# EAGLE board kolektorius_v2.2_ch340g (EAGLE 6.5.0)
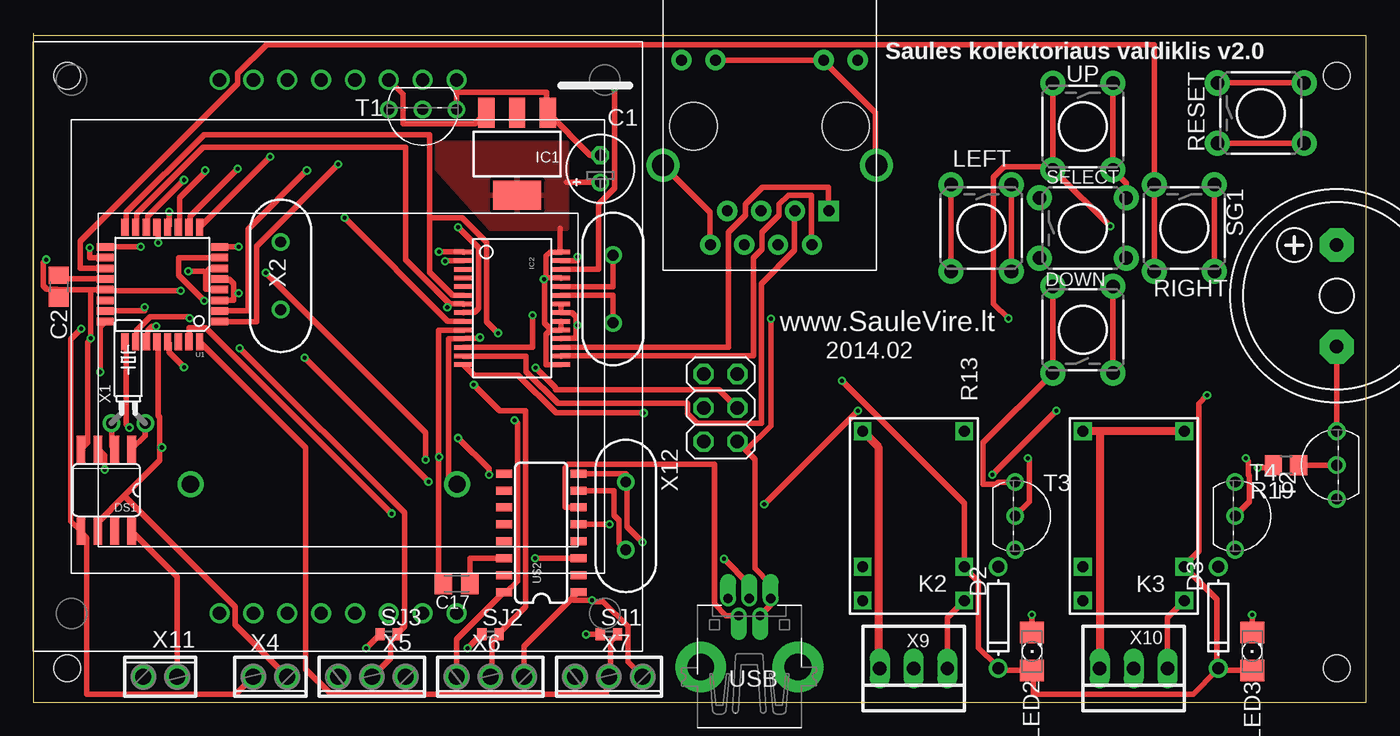
[diagram p0: board, top side]
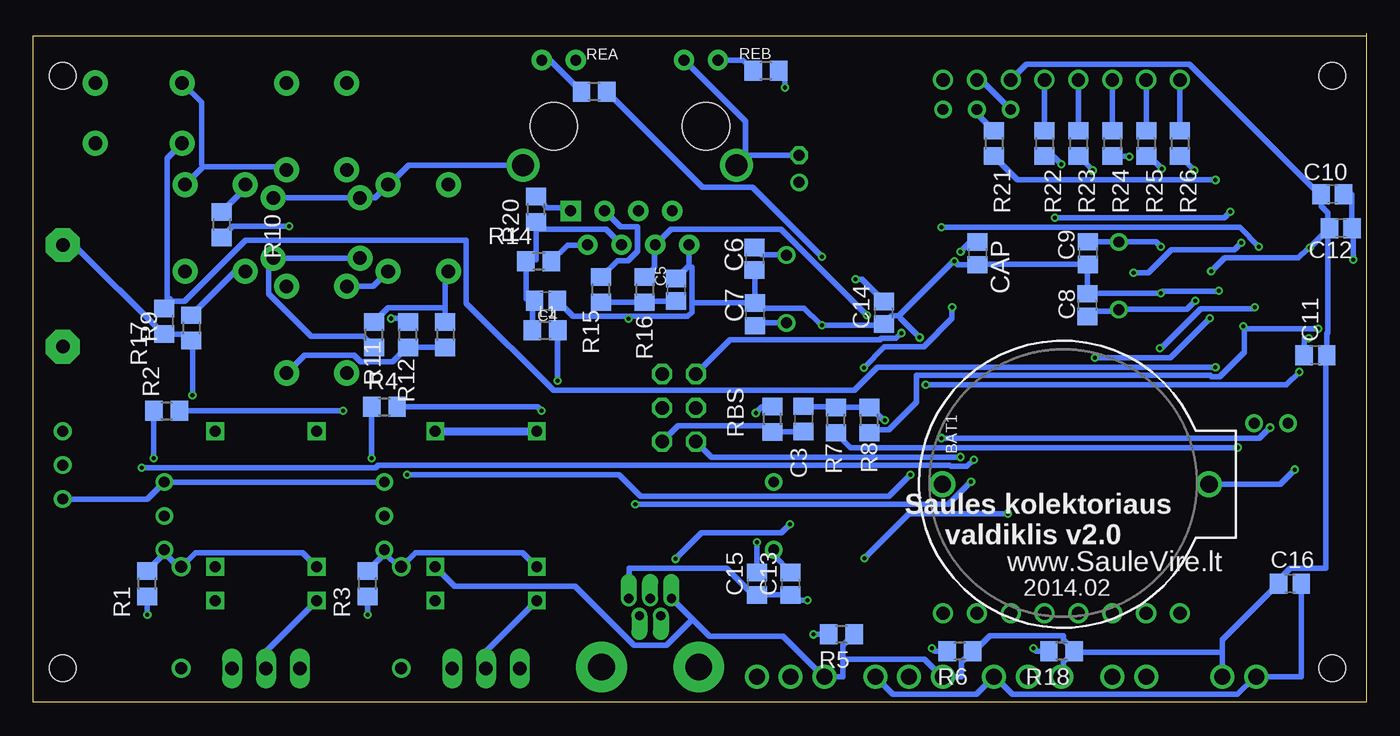
[diagram p1: board, bottom side, seen from below]

Size 100 x 50.16 mm. Coordinates in mm from the lower left corner, seen from the top.
Outline: 0,50 100,50 100,0 0,0 0,50.16
Copper layers (1*16): Top 0.035mm / dielectric 1.5mm / Bottom 0.035mm
Design rules "ITEADstudio_DRC": minimum track width 6mil, minimum drill 12mil, track to track 6mil, track to pad 6mil, pad to pad 6mil, via to via 6mil, smd to smd 0mil, copper to edge 10mil, drill to drill 10mil, minimum pad ring 10mil, minimum via ring 6mil, stop-mask expansion 2mil, vias tented up to drill 100mil, thermal gap 10mil
Net classes: 0 default: width 0.406 mm, clearance 0.203 mm; 1 power: width 0.61 mm, clearance 0.203 mm; 2 GND: width 0.61 mm; 3 signal: width 0.457 mm
Holes 2 mm at 2.54,2.54 97.79,2.54 2.54,46.99 97.79,46.99
vRestrict: area 32,73 to 71,78

## Footprints (pad centres in the part's own frame; a part is rotated, then mirrored left to right if it is on the bottom)
BATTCOM_20MM_PTH = drill 1.3: 1 20,0; 2 0,0
E2-5 = drill 0.813 pad 1.27: + -1.016,0 | drill 0.813 pad 1.27 octagon: - 1.016,0
C0805 = smd 1.3 x 1.5: 1 -0.85,0; 2 0.85,0
C0805' = smd 1.3 x 1.5: 1 -0.95,0; 2 0.95,0
C0805K = smd 1.3 x 1.6: 1 -1,0; 2 1,0
DO-1N4148 = drill 0.9: A -3.81,0; C 3.81,0
TACTILE-PTH = drill 1.016 pad 1.88: 1 -3.251,2.261; 2 3.251,2.261; 3 -3.251,-2.261; 4 3.251,-2.261
SO08 = smd 0.66 x 2.032: 1 -1.905,-3.073; 2 -0.635,-3.073; 3 0.635,-3.073; 4 1.905,-3.073; 5 1.905,3.073; 6 0.635,3.073; 7 -0.635,3.073; 8 -1.905,3.073
SOT223 = smd 1.219 x 2.235: 1 -2.311,-3.099; 2 0,-3.099; 3 2.311,-3.099 | smd 3.6 x 2.2: 4 0,3.099
SSOP28DB = smd 0.348 x 1.397: 1 -4.225,-3.656; 2 -3.575,-3.656; 3 -2.925,-3.656; 4 -2.275,-3.656; 5 -1.625,-3.656; 6 -0.975,-3.656; 7 -0.325,-3.656; 8 0.325,-3.656; 9 0.975,-3.656; 10 1.625,-3.656; 11 2.275,-3.656; 12 2.925,-3.656; 13 3.575,-3.656; 14 4.225,-3.656; 15 4.225,3.656; 16 3.575,3.656; 17 2.925,3.656; 18 2.275,3.656; 19 1.625,3.656; 20 0.975,3.656; 21 0.325,3.656; 22 -0.325,3.656; 23 -0.975,3.656; 24 -1.625,3.656; 25 -2.275,3.656; 26 -2.925,3.656; 27 -3.575,3.656; 28 -4.225,3.656
2X03 = drill 1.016 octagon: 1 -2.54,-1.27; 2 -2.54,1.27; 3 0,-1.27; 4 0,1.27; 5 2.54,-1.27; 6 2.54,1.27
G5V1 = drill 0.813 square: 1 0,0; 2 2.54,0; 5 12.7,0; 6 12.7,7.62; 9 2.54,7.62; 10 0,7.62
R0805 = smd 1.3 x 1.5: 1 -0.95,0; 2 0.95,0
1206 = smd 1.6 x 1.803: A -1.422,0; C 1.422,0
HR911105A = drill 0.813 pad 1.524: G+ 4.953,-6.604; G- 4.953,-4.064; GND -8.89,4.445; NC -6.35,3.175; P4 -8.89,-0.635; P5 -6.35,0.635; RD+ -6.35,-1.905; RD- -8.89,1.905; TD- -8.89,-3.175; Y+ 4.953,6.604; Y- 4.953,4.064 | drill 1.651 pad 2.159: SHIELD0 -2.921,8.001; SHIELD1 -2.921,-8.001 | drill 0.813 pad 1.524 square: TD+ -6.35,-4.445 | hole 3.556: 0,-5.715; 0,5.715
F/HMB = drill 1.016 pad 2.54 octagon: + 3.81,0; - -3.81,0
R0402 = smd 0.7 x 0.9: 1 -0.65,0; 2 0.65,0
TO92-EBC-OVAL = drill 0.813: B 0,-1.27; C 2.54,-1.27; E -2.54,-1.27
TQFP32-08 = smd 1.27 x 0.559: 1 -4.293,2.8; 2 -4.293,2; 3 -4.293,1.2; 4 -4.293,0.4; 5 -4.293,-0.4; 6 -4.293,-1.2; 7 -4.293,-2; 8 -4.293,-2.8; 17 4.293,-2.8; 18 4.293,-2; 19 4.293,-1.2; 20 4.293,-0.4; 21 4.293,0.4; 22 4.293,1.2; 23 4.293,2; 24 4.293,2.8 | smd 0.559 x 1.27: 9 -2.8,-4.293; 10 -2,-4.293; 11 -1.2,-4.293; 12 -0.4,-4.293; 13 0.4,-4.293; 14 1.2,-4.293; 15 2,-4.293; 16 2.8,-4.293; 25 2.8,4.293; 26 2,4.293; 27 1.2,4.293; 28 0.4,4.293; 29 -0.4,4.293; 30 -1.2,4.293; 31 -2,4.293; 32 -2.8,4.293
CELLPHONE_NOKIA_5100_SPARKFUN = drill 1: P$1 -8.89,20; P$2 -6.35,20; P$3 -3.81,20; P$4 -1.27,20; P$5 1.27,20; P$6 3.81,20; P$7 6.35,20; P$8 8.89,20; P$9 -8.89,-20; P$10 -6.35,-20; P$11 -3.81,-20; P$12 -1.27,-20; P$13 1.27,-20; P$14 3.81,-20; P$15 6.35,-20; P$16 8.89,-20
SO016 = smd 0.6 x 1.2: 1 -4.445,-2.8; 2 -3.175,-2.8; 3 -1.905,-2.8; 4 -0.635,-2.8; 5 0.635,-2.8; 6 1.905,-2.8; 7 3.175,-2.8; 8 4.445,-2.8; 9 4.445,2.8; 10 3.175,2.8; 11 1.905,2.8; 12 0.635,2.8; 13 -0.635,2.8; 14 -1.905,2.8; 15 -3.175,2.8; 16 -4.445,2.8
USB-MINIB-THM-MOLEX = drill 0.7 offset: D+ 0,9.72; D- -0.8,8.42; GND 1.6,9.72; ID 0.8,8.42; VBUS -1.6,9.72 | drill 2 pad 3.81: GND1 -3.65,4.57; GND4 3.65,4.57
TC26H = drill 0.813: 1 -1.27,0; 2 1.27,0
HC49US = drill 0.813: 1 -2.54,0; 2 2.54,0
2POL254 = drill 1.2: 1 -1.27,0; 2 1.27,0
3POL254 = drill 1.2: 1 -2.54,0; 2 0,0; 3 2.54,0
22-23-2031 = drill 1 long: 1 -2.54,0; 2 0,0; 3 2.54,0

## Placement (x,y rotation side)
BAT1  [BATTCOM_20MM_PTH]  31.8,16.35 0 bottom
C1  100u  [E2-5]  42.55,40.01 90 top
C2  100n  [C0805]  1.91,31.17 270 top
C3  0.1u  [C0805']  42.21,21.24 270 bottom
C4  0.1µ  [C0805]  61.55,30.1 180 bottom
C5  0.1µ  [C0805]  51.76,30.93 270 bottom
C6  18p  [C0805]  45.88,33.26 270 bottom
C7  18p  [C0805]  45.86,29.09 90 bottom
C8  22p  [C0805]  20.92,29.79 270 bottom
C9  22p  [C0805]  20.87,33.69 90 bottom
C10  100n  [C0805]  2.54,38.1 0 bottom
C11  100n  [C0805]  3.81,26.04 0 bottom
C12  100n  [C0805]  1.91,35.56 180 bottom
C13  22p  [C0805]  43.18,8.89 90 bottom
C14  100n  [C0805]  36.2,29.21 270 bottom
C15  22p  [C0805]  45.72,8.89 90 bottom
C16  100n  [C0805]  5.71,8.89 0 bottom
C17  [C0805K]  31.75,8.89 180 top
CAP  10u  [C0805]  29.16,33.66 270 bottom
D2  [DO-1N4148]  72.39,6.35 270 top
D3  [DO-1N4148]  88.9,6.35 270 top
DOWN  [TACTILE-PTH]  78.74,27.94 90 top
DS1  DS1307  [SO08]  5.48,15.91 180 top
IC1  LM1117-33  [SOT223]  36.3,41.12 180 top
IC2  ENC28J60  [SSOP28DB]  35.93,29.54 270 top
ISP  [2X03]  51.56,22.08 270 top
K2  G5V1  [G5V1]  69.85,7.62 90 top
K3  JRC-21F(4100)  [G5V1]  86.36,7.62 90 top
L1  Bead  [R0805]  61.61,27.91 0 bottom
LED2  [1206]  74.93,3.81 90 top
LED3  [1206]  91.44,3.81 90 top
LEFT  [TACTILE-PTH]  71.12,35.56 270 top
R1  470  [R0805]  91.44,8.89 90 bottom
R2  3k3  [R0805]  89.99,21.87 0 bottom
R3  470  [R0805]  74.93,8.89 90 bottom
R4  3k3  [R0805]  73.66,22.17 0 bottom
R5  4k7  [R0805]  39.37,5.08 180 bottom
R6  4k7  [R0805]  30.48,3.81 180 bottom
R7  10k  [R0805]  39.78,21.16 90 bottom
R8  10k  [R0805]  37.27,21.16 90 bottom
R9  2k  [R0805]  88.14,28.07 270 bottom
R10  330  [R0805]  85.85,35.81 90 bottom
R11  3k3  [R0805]  74.42,27.56 90 bottom
R12  620  [R0805]  71.88,27.56 90 bottom
R13  1k  [R0805]  69.09,27.56 270 bottom
R14  49  [R0805]  62.09,33.05 180 bottom
R15  49  [R0805]  57.42,30.95 90 bottom
R16  49  [R0805]  54.14,30.94 270 bottom
R17  10k  [R0805]  90.17,28.57 270 bottom
R18  4k7  [R0805]  22.86,3.81 180 bottom
R19  1k  [R0805]  93.98,17.78 180 top
R20  49  [R0805]  62.27,36.97 90 bottom
R21  1k  [R0805]  27.94,41.91 270 bottom
R22  10k  [R0805]  24.13,41.91 270 bottom
R23  10k  [R0805]  21.59,41.91 270 bottom
R24  10k  [R0805]  19.05,41.91 270 bottom
R25  10k  [R0805]  16.51,41.91 270 bottom
R26  10k  [R0805]  13.97,41.91 270 bottom
RBS  2.32K  [R0805]  44.53,21.23 90 bottom
REA  330  [R0805]  57.92,45.8 180 bottom
REB  330  [R0805]  45.03,47.36 180 bottom
RESET  [TACTILE-PTH]  92.09,44.18 0 top
RIGHT  [TACTILE-PTH]  86.36,35.56 270 top
RJ1  HR911105A  [HR911105A]  55.24,43.2 90 top
SELECT  [TACTILE-PTH]  78.74,35.56 0 top
SG1  F/HMB  [F/HMB]  97.79,30.48 90 top
SJ1  0R  [R0402]  43.18,5.08 0 top
SJ2  0R  [R0402]  34.29,5.08 0 top
SJ3  0R  [R0402]  26.67,5.08 0 top
T1  2N2222  [TO92-EBC-OVAL]  29.21,43.18 180 top
T2  2N2222  [TO92-EBC-OVAL]  96.52,17.78 90 top
T3  2N2222  [TO92-EBC-OVAL]  74.93,13.97 270 top
T4  2N2222  [TO92-EBC-OVAL]  91.44,13.97 270 top
U1  ATMEGA328P  [TQFP32-08]  9.68,31.34 180 top
U$1  CELLPHONE_NOKIA_5100  [CELLPHONE_NOKIA_5100_SPARKFUN]  22.86,26.67 0 top
U$2  CH340G  [SO016]  38.1,12.7 90 top
UP  [TACTILE-PTH]  78.74,43.18 270 top
USB  [USB-MINIB-THM-MOLEX]  53.72,-1.93 0 top
X1  32.768kHz  [TC26H]  7.13,20.93 0 top
X2  16MHz  [HC49US]  18.56,31.98 270 top
X3  25MHz  [HC49US]  43.49,30.99 90 top
X4  [2POL254]  17.78,1.91 180 top
X5  [3POL254]  25.4,1.91 180 top
X6  [3POL254]  34.29,1.91 180 top
X7  [3POL254]  43.18,1.91 180 top
X9  22-23-2031  [22-23-2031]  66.04,2.54 180 top
X10  22-23-2031  [22-23-2031]  82.55,2.54 180 top
X11  [2POL254]  9.53,1.91 0 top
X12  16MHz  [HC49US]  44.45,13.97 270 top

## Library data of the parts
BAT1 DOWN LEFT RESET RIGHT SELECT UP = SparkFun-Electromechanical
C1 C2 C4-C16 CAP = resistor
C3 C17 L1 R1-R26 RBS REA REB SJ1-SJ3 = rcl
D2 D3 DS1 LED2 LED3 T1-T4 USB = adafruit
IC1 X2 X3 X12 = SparkFun
IC2 = SparkFun-DigitalIC
ISP = pinhead
K2 K3 = relay; MPN: G5V-1-DC24; OC_FARNELL: 9949593; OC_NEWARK: 36M6377
RJ1 = CONNECTER
SG1 = buzzer; OC_FARNELL: unknown; OC_NEWARK: unknown
U1 = SparkFun-DigitalIC; PROD_ID: IC-09069
U$1 = DIY-Cellphone
U$2 = ch340
X1 = crystal; OC_FARNELL: unknown; OC_NEWARK: unknown
X4-X7 X11 = con-phoenix-254; OC_FARNELL: unknown; OC_NEWARK: unknown
X9 X10 = con-molex; MF: MOLEX; MPN: 22-23-2031; OC_FARNELL: 1462950; OC_NEWARK: 30C0862

## Nets
+3V3: C1.+ C14.1 IC1.4 IC2.15 IC2.19 IC2.20 IC2.25 IC2.28
+5V: C3.1 C10.1 C11.2 C12.2 C16.1 D2.C D3.C DS1.8 IC1.3 K2.2 K3.2 L1.2 LED2.A LED3.A R5.1 R6.1 R7.2 R8.2 R9.2 R17.2 R18.1 SG1.+ U1.4 U1.6 U1.18 U$1.P$6 U$2.16 USB.VBUS X5.3 X6.3 X7.3 X11.2
A0: SJ3.2 U1.23 X5.2
A1: SJ2.2 U1.24 X6.2
A2: R2.2 U1.25
A3: R4.2 U1.26
A6: R9.1 R10.2 RIGHT.3 RIGHT.4 U1.19
A7: U1.22
D2: SJ1.2 U1.32 X7.2
D3: R22.2 U1.1
D4: R23.2 U1.2
D5: R24.2 U1.9
D6: R25.2 U1.10
D7: R26.2 U1.11
D8: IC2.9 U1.12
D9: R19.2 U1.13
D10: R21.2 U1.14
D11: IC2.7 ISP.4 U1.15
D12: IC2.6 ISP.1 U1.16
D13: IC2.8 U1.17
GND: BAT1.2 C1.- C2.2 C3.2 C4.1 C5.1 C6.2 C7.2 C8.1 C9.1 C10.2 C11.1 C12.1 C13.1 C14.2 C15.1 C16.2 CAP.2 DOWN.1 DOWN.2 DS1.4 IC1.1 IC2.2 IC2.11 IC2.18 IC2.21 IC2.22 ISP.6 LEFT.1 LEFT.2 RBS.1 RESET.1 RESET.2 RIGHT.1 RIGHT.2 RJ1.G- RJ1.GND RJ1.SHIELD0 RJ1.SHIELD1 RJ1.Y- SELECT.1 SELECT.2 T1.E T2.E T3.E T4.E U1.3 U1.5 U1.21 U$1.P$8 U$2.1 UP.1 UP.2 USB.GND USB.ID X5.1 X6.1 X7.1 X11.1
LEDA: REA.2 RJ1.G+
LEDB: REB.2 RJ1.Y+
N$1: LEFT.3 LEFT.4 R11.2 R13.1
N$2: D2.A K2.9 R3.2 T3.C
N$3: R4.1 T3.B
N$4 [power]: K2.5 K2.6 X9.3
N$5: K2.10 X9.2
N$6: DOWN.3 DOWN.4 R12.1 R13.2
N$7: LED2.C R3.1
N$8: DS1.1 X1.2
N$9: R10.1 R12.2 UP.3 UP.4
N$10: C13.2 U$2.7 X12.2
N$11: U$2.6 USB.D-
N$12: D3.A K3.9 R1.2 T4.C
N$13: R2.1 T4.B
N$14: K2.1 X9.1
N$15: U$2.5 USB.D+
N$16: K3.10 X10.2
N$17: R6.2 SJ2.1
N$18: R11.1 SELECT.3 SELECT.4
N$19 [power]: K3.5 K3.6 X10.3
N$20: K3.1 X10.1
N$21: LED3.C R1.1
N$22: R22.1 U$1.P$5
N$23: R25.1 U$1.P$2
N$24: R24.1 U$1.P$3
N$25: R23.1 U$1.P$4
N$26 [signal]: T1.C U$1.P$7
N$27: R19.1 T2.B
N$28: R18.2 SJ3.1
N$29: SG1.- T2.C
N$30: DS1.2 X1.1
N$31: R5.2 SJ1.1
N$32: C9.2 U1.8 X2.1
N$33: C8.2 U1.7 X2.2
N$34: IC2.27 REA.1
N$35: C2.1 U1.20
N$36: BAT1.1 DS1.3
N$37: IC2.26 REB.1
N$39: CAP.1 IC2.1
N$40: C15.2 U$2.8 X12.1
N$41: C6.1 IC2.24 X3.2
N$42: C7.1 IC2.23 X3.1
N$43: C17.1 U$2.14
N$44: R21.1 T1.B
N$46: R17.1 RESET.3 RESET.4 U1.29
N$54: C5.2 R15.1 R16.2
N$59: IC2.14 RBS.2
RD+: IC2.13 R15.2 RJ1.RD+
RD-: IC2.12 R16.1 RJ1.RD-
RESET: C17.2 IC2.10 ISP.5
RXD: U1.30
SCK: ISP.3
SCL: DS1.6 R7.1 U1.28 X4.1
SDA: DS1.5 R8.1 U1.27 X4.2
TCT: C4.2 L1.1 R14.2 R20.1 RJ1.P4
TD+: IC2.17 R20.2 RJ1.TD+
TD-: IC2.16 R14.1 RJ1.TD-
TXD: U1.31 U$2.3
V$: R26.1 U$1.P$1
VIN: ISP.2

## Tracks (layer width: path | path; a pad name or v marks a point on that pad's centre or on a via)
+3V3  (via drill 0.3)
  Top 0.406: 40.01,38.99 C1.+ | 38.79,27.91 38.48,27.61 38.48,25.32 39.57,25.32 IC2.15 | 38.79,27.91 39.57,27.91 IC2.19 39.6,28.12 IC2.20 | 38.48,31.83 39.57,31.83 IC2.25 | 38.48,31.83 38.48,33.48 38.76,33.76 39.57,33.76 IC2.28 39.52,33.96 39.52,35.56 | 38.48,31.83 v38.3,31.73 38.35,31.52 38.35,28.42 38.68,28.09 38.79,27.91
  Bottom 0.406: v38.3,31.73 37.85,31.73 36.2,30.07 C14.1
  pour Top: 28.57,41.91 40.01,41.91 40.01,35.56 34.29,35.56
+5V  (via drill 0.3)
  Top 0.406: D3.C 88.9,2.41 91.44,2.41 LED3.A | D3.C 88.8,2.72 88.8,7.72 K3.2 86.46,10.34 87.43,11.3 87.43,22.38 v88.06,23.01 | v60.68,24.11 69.85,14.94 K2.2 69.95,9.98 70.92,9.02 70.92,4.09 72.29,2.72 D2.C 72.39,2.41 74.93,2.41 LED2.A 75.03,2.21 75.03,0.61 87.02,0.61 88.72,2.31 D3.C | IC1.3 33.96,44.2 33.15,43.38 27.74,43.38 27.74,45.59 U$1.P$6 | 12.93,32.21 12.93,30.96 13.97,30.96 U1.4 | 12.93,32.21 13.26,32.54 U1.6 | v4.24,34.09 4.24,33.35 U1.18 | v11.63,32.31 12.75,32.31 12.93,32.21 | X11.2 10.79,9.42 DS1.8 | X6.3 31.75,4.72 35.28,8.26 U$2.16 35.48,8.23 36.32,9.07 36.32,20.93 v36.09,21.16
  Bottom 0.406: SG1.+ 96.93,34.29 90.35,27.71 R17.2 88.62,27.61 R9.2 88.06,26.92 v88.06,23.01 | v60.68,24.11 60.68,27.89 L1.2 | C12.2 2.77,35.56 v4.24,34.09 4.42,33.98 5.08,33.33 10.62,33.33 v11.63,32.31 | C12.2 2.87,35.18 2.87,27.71 2.95,27.64 2.95,26.04 C11.2 3.05,25.86 3.05,10.06 5.69,10.06 6.68,9.07 C16.1 6.58,8.89 10.79,4.67 10.79,3.73 | C12.2 2.87,35.74 2.87,36.7 3.38,37.21 3.38,38.1 C10.1 3.58,38.18 13.26,47.85 25.5,47.85 26.67,46.69 U$1.P$6 | 39.24,3.23 39.24,1.91 X7.3 40.82,2.01 43.76,4.95 49.28,4.95 50.53,6.21 | 39.24,3.23 39.24,4.27 R5.1 | 50.53,6.21 52.09,7.77 USB.VBUS | X11.2 10.79,3.73 | X5.3 22.73,1.91 22.73,3 R18.1 | C3.1 42.19,22.17 42.16,22.15 39.98,22.15 R7.2 39.78,22.12 37.29,22.12 R8.2 37.08,22.02 36.22,21.16 v36.09,21.16 | R18.1 22.02,3.99 22.73,4.7 22.73,4.98 28.25,4.98 29.34,3.89 R6.1 30.35,3 30.35,1.91 X6.3 31.93,2.01 33.15,3.23 39.24,3.23 | 10.79,3.73 21.72,3.73 R18.1 | K2.2 68.38,8.69 59.36,8.69 54.94,4.27 52.48,4.27 50.53,6.21
A0  (via drill 0.3)
  Top 0.406: X5.2 26.8,3.3 26.8,4.57 27.3,5.08 SJ3.2 27.41,5.26 27.84,5.69 27.84,14.2 v15.49,26.54 | v8.36,29.62 8.36,29.36 5.41,29.36 U1.23
  Bottom 0.406: v8.36,29.62 8.46,29.52 12.39,29.52 15.37,26.54 v15.49,26.54
A1  (via drill 0.3)
  Top 0.406: X6.2 34.42,2.03 34.42,4.57 34.92,5.08 SJ2.2 35.03,5.26 36.93,7.16 36.93,21.87 34.98,21.87 v33.05,23.8 | v5.03,24.77 5.03,28.17 5.38,28.52 U1.24
  Bottom 0.406: v5.03,24.77 5.99,23.8 v33.05,23.8
A2  (via drill 0.3)
  Top 0.406: v7.21,20.6 6.99,20.83 6.99,26.92 6.88,27.03 U1.25 | v31.88,19.81 34.19,17.5 v34.19,17.07 | v76.76,21.87 v71.96,17.07
  Bottom 0.406: v7.21,20.6 8,19.81 v31.88,19.81 | v34.19,17.07 35.81,15.44 54.43,15.44 56.06,17.07 v71.96,17.07 | R2.2 v76.76,21.87
A3  (via drill 0.3)
  Top 0.406: v11.73,28.8 11.73,28.91 8.76,28.91 7.77,27.91 7.77,27.13 7.7,27.05 U1.26 | v29.64,16.54 v20.34,25.83 | v61.87,21.87 v54.84,14.83
  Bottom 0.406: v11.73,28.8 14.71,25.83 v20.34,25.83 | v29.64,16.54 31.34,14.83 v54.84,14.83 | v61.87,21.87 62.18,22.17 R4.2
A6
  Top 0.406: U1.19 5.38,32.56 3.53,32.56 3.53,34.57 15.34,46.38 15.34,47.17 17.5,49.33 84.1,49.33 RIGHT.3 RIGHT.4
  Bottom 0.406: RIGHT.4 84.86,32.31 88.14,29.03 R9.1 | RIGHT.3 84.1,38.53 85.85,36.78 R10.2
D2
  Top 0.406: SJ1.2 43.81,5.08 43.31,4.57 43.31,2.03 X7.2 43,1.8 43,0.58 22.33,0.58 20.42,2.49 20.42,19.1 12.5,27.03 U1.32
D3  (via drill 0.3)
  Top 0.406: v22.86,40.34 16.74,34.21 16.74,28.55 13.99,28.55 U1.1
  Bottom 0.406: v22.86,40.34 23.47,40.95 24.13,40.95 R22.2
D4  (via drill 0.3)
  Top 0.406: v20.52,39.88 16.13,35.48 16.13,29.36 13.99,29.36 U1.2
  Bottom 0.406: v20.52,39.88 21.59,40.95 R23.2
D5  (via drill 0.3)
  Top 0.406: v17.78,40.92 12.5,35.64 U1.9
  Bottom 0.406: v17.78,40.92 17.8,40.95 19.05,40.95 R24.2
D6  (via drill 0.3)
  Top 0.406: v15.34,40.01 11.79,36.45 11.79,35.74 U1.10
  Bottom 0.406: v15.34,40.01 16.28,40.95 16.51,40.95 R25.2
D7  (via drill 0.3)
  Top 0.406: v12.9,39.88 12.9,39.75 10.97,37.82 10.97,35.71 10.9,35.64 U1.11
  Bottom 0.406: v12.9,39.88 13.97,40.95 R26.2
D8  (via drill 0.3)
  Top 0.406: v10.19,36.78 10.19,35.74 U1.12 | v23.34,36.32 31.09,28.57 32.26,28.57 IC2.9
  Bottom 0.406: v10.19,36.78 10.64,36.32 v23.34,36.32
D9  (via drill 0.3)
  Top 0.406: v9.37,34.47 9.37,35.53 9.3,35.61 U1.13 | v17.45,32.21 29.44,20.22 v29.44,18.19 | v91.87,17.58 93.02,17.58 93.02,17.78 R19.2
  Bottom 0.406: v9.37,34.47 9.91,33.93 14.63,33.93 16.36,32.21 v17.45,32.21 | v29.44,18.19 29.95,17.68 31.17,17.68 31.27,17.78 74.12,17.78 74.32,17.58 v91.87,17.58
D10  (via drill 0.3)
  Top 0.406: U1.14 8.59,35.74 8.59,36.45 v11.3,39.17
  Bottom 0.406: v11.3,39.17 26.16,39.17 27.94,40.95 R21.2
D11  (via drill 0.3)
  Top 0.406: 31.24,29.87 27.94,33.17 27.94,41.63 12.75,41.63 7.77,36.65 7.77,35.71 7.7,35.64 U1.15 | 31.24,29.87 32.26,29.87 IC2.7 | v37.69,25.09 39.19,23.6 39.19,23.44 51.46,23.44 52.81,22.1 ISP.4 | v31.06,29.62 31.14,29.69 31.24,29.87
  Bottom 0.406: v37.69,25.09 36.14,26.64 33.2,26.64 31.06,28.78 v31.06,29.62
D12  (via drill 0.3)
  Top 0.406: 29.72,36.32 29.72,32.26 31.45,30.53 32.26,30.53 IC2.6 | 29.72,36.32 29.72,42.55 12.8,42.55 6.99,36.73 6.99,35.74 U1.16 | v34.87,27.69 34.01,28.55 34.01,34.49 32.18,36.32 29.72,36.32
  Bottom 0.406: v34.87,27.69 35.28,27.28 36.37,27.28 36.47,27.18 47.73,27.18 50.27,24.64 ISP.1
D13  (via drill 0.3)
  Top 0.406: v8.05,34.16 5.41,34.16 U1.17 | v31.88,35.61 33.4,34.09 33.4,29.54 33.1,29.23 32.28,29.23 IC2.8
  Bottom 0.406: v8.05,34.16 9.5,35.61 v31.88,35.61
GND  (via drill 0.3)
  Top 0.406: USB.ID 54.53,6.5 55.3,7.26 55.3,7.77 USB.GND 55.27,8 55.27,8.89 54.13,10.03 54.13,18.24 53.48,18.89 | 40.42,7.79 36.83,4.19 X6.1 | 40.42,7.79 U$2.1 | 40.42,7.79 40.56,7.64 v41.91,7.64 42.09,7.54 42.75,7.54 44.6,5.69 44.6,3.02 X7.1 | 53.48,18.89 ISP.6 | RESET.1 88.85,46.46 95.33,46.46 RESET.2 | RIGHT.1 RIGHT.2 | SELECT.2 81.99,38.94 UP.2 UP.1 | T3.E 72.42,16.51 72.26,16.36 71.25,16.36 71.25,19.46 DOWN.1 DOWN.2 | LEFT.2 LEFT.1 | RJ1.Y- 59.28,48.16 RJ1.G- 59.41,47.98 63.2,44.2 63.2,40.31 63.22,40.28 RJ1.SHIELD1 | U$1.P$8 31.75,45.74 | 31.75,45.74 T1.E | C1.- 41.78,41.02 38.61,44.2 IC1.1 38.51,44.4 38.51,45.74 31.75,45.74 | 4.32,30.94 1.93,30.94 1.93,30.33 C2.2 1.75,30.96 0.99,30.96 0.74,31.22 0.74,32.97 v0.96,33.2 | 4.32,30.94 U1.21 5.59,30.86 v11.05,30.86 | 4.32,30.94 v4.32,27.3 4.22,27.13 4.09,27 4.09,19.51 3.58,19 DS1.4 | BAT1.2 31.77,16.36 31.17,16.97 31.17,27.25 32.26,27.25 IC2.11 32.49,27.3 33.5,27.3 v33.5,27.36 | 15.04,30.66 15.04,31.37 14.68,31.73 13.99,31.73 U1.5 | 15.04,30.66 15.04,30.15 13.99,30.15 U1.3 | v15.42,30.66 15.04,30.66 | 40.72,28.27 40.72,28.91 40.41,29.21 IC2.21 39.6,29.41 39.6,29.84 IC2.22 | 40.72,28.27 40.72,27.28 IC2.18 | v30.89,33.07 30.89,33.1 32.26,33.1 IC2.2 | v40.82,28.27 40.72,28.27 | RJ1.SHIELD0 47.24,40.26 50.77,36.73 50.77,34.31 RJ1.GND | 53.48,18.89 55.35,20.75 v55.35,28.75
  Bottom 0.406: C3.2 44.53,20.3 RBS.1 44.7,20.4 45.03,20.73 51.64,20.73 52.81,19.56 ISP.6 | C16.2 4.88,1.91 X11.1 8.43,1.8 9.65,0.58 26.54,0.58 27.76,1.8 X5.1 29.26,0.58 35.51,0.58 X6.1 | v41.91,7.64 42.7,7.64 43,7.95 C13.1 43.18,8.05 45.72,8.05 C15.1 45.9,8.15 46.13,8.15 48.01,10.03 55.3,10.03 55.3,7.8 USB.GND | SELECT.2 SELECT.1 74.37,37.82 LEFT.1 73.2,38.91 71.86,40.26 63.25,40.26 RJ1.SHIELD1 | 87.27,40.16 RIGHT.1 | 87.27,40.16 81.23,40.16 UP.2 | RESET.1 88.82,46.43 87.38,44.98 87.38,40.34 87.27,40.16 | T2.E 91.44,15.24 T4.E T3.E | LEFT.2 74.5,31.19 DOWN.2 | C1.- 46.48,41.02 47.22,40.28 RJ1.SHIELD0 46.58,41.2 46.58,43.56 51.16,48.13 RJ1.Y- | C10.2 1.07,38.1 C12.1 0.96,35.38 v0.96,33.2 | v4.32,27.3 4.65,27.3 4.65,26.04 C11.1 | C7.2 45.87,29.95 45.87,32.38 C6.2 | 50.8,32.74 51.74,31.8 C5.1 | 50.8,32.74 50.8,34.29 RJ1.GND | 55.35,28.93 50.93,28.93 50.6,29.26 50.6,29.95 | 55.35,28.93 59.51,28.93 60.68,30.1 C4.1 | 50.6,29.95 50.6,32.64 50.62,32.64 50.8,32.74 | 50.6,29.95 46.08,29.95 C7.2 | 35.05,28.98 35.59,28.98 36.2,28.37 C14.2 36.37,28.27 v40.82,28.27 41,28.37 42.16,29.54 45.36,29.54 45.67,29.84 C7.2 | 35.05,28.98 31.06,32.97 v30.89,33.07 30.63,32.82 29.18,32.82 CAP.2 28.96,32.84 21.08,32.84 C9.1 20.88,32.82 20.9,32.82 20.9,30.66 C8.1 20.7,30.66 v15.42,30.66 15.29,30.81 11.1,30.81 v11.05,30.86 | v33.5,27.36 34.95,28.8 35.05,28.98 | v55.35,28.75 55.35,28.93
LEDA
  Bottom 0.406: REA.2 61.21,48.13 61.82,48.13 RJ1.G+
LEDB
  Bottom 0.406: REB.2 46,47.37 46.76,48.13 48.62,48.13 RJ1.Y+
N$1
  Top 0.406: LEFT.4 LEFT.3
  Bottom 0.406: 69.09,29.57 69.09,32.31 LEFT.4 | 69.09,29.57 R13.1 | 69.09,29.57 73.38,29.57 74.42,28.52 R11.2
N$2
  Bottom 0.406: R3.2 74.93,9.86 73.66,11.12 T3.C 73.48,11.02 72.72,10.26 72.57,10.26 D2.A 71.32,11.23 63.3,11.23 K2.9
N$3  (via drill 0.3)
  Top 0.406: v74.62,18.29 74.73,18.19 74.73,15.04 T3.B
  Bottom 0.406: v74.62,18.29 74.62,22.17 R4.1
N$4
  Top 0.61: X9.3 63.4,2.64 63.4,19.15 K2.6
  Bottom 0.61: K2.5 K2.6
N$5
  Bottom 0.406: K2.10 66.04,3.81 X9.2
N$6
  Top 0.406: DOWN.3 DOWN.4
  Bottom 0.406: R13.2 R12.1 72.06,26.52 73.03,25.55 75.44,25.55 75.92,26.04 79.65,26.04 DOWN.3
N$7  (via drill 0.3)
  Top 0.406: LED2.C v74.93,6.55
  Bottom 0.406: v74.93,6.55 R3.1
N$8
  Top 0.406: DS1.1 7.39,19 8.38,19.99 8.38,20.9 X1.2
N$9  (via drill 0.3)
  Top 0.406: v73.15,28.78 72.03,29.9 72.03,39.37 72.82,40.16 76.48,40.16 UP.4 | v80.8,35.69 76.66,39.83 UP.4 | UP.4 UP.3
  Bottom 0.406: v73.15,28.78 72.14,28.78 71.88,28.52 R12.2 | v80.8,35.69 85.04,35.69 85.85,34.87 R10.1
N$10
  Top 0.406: U$2.7 43.56,15.88 43.56,14.02 43.94,13.64 43.94,11.94 X12.2
  Bottom 0.406: X12.2 44.45,11.02 43.18,9.75 C13.2
N$11
  Top 0.406: U$2.6 39.88,14.61 39.88,17.6 40.13,17.86 51.1,17.86 51.1,7.37 51.97,6.5 52.91,6.5 USB.D-
N$12
  Bottom 0.406: R1.2 91.44,9.86 90.17,11.12 T4.C 89.99,11.02 89.23,10.26 89.08,10.26 D3.A 87.83,11.23 79.81,11.23 K3.9
N$13  (via drill 0.3)
  Top 0.406: v90.96,18.29 91.16,18.09 91.16,17.04 91.24,16.97 91.24,15.04 T4.B
  Bottom 0.406: v90.96,18.29 90.96,21.87 R2.1
N$14
  Top 0.406: K2.1 68.58,6.35 X9.1
N$15  (via drill 0.3)
  Top 0.406: v43.23,13.34 U$2.5 | v51.82,10.74 53.7,8.87 53.7,7.8 USB.D+
  Bottom 0.406: v43.23,13.34 43.87,12.7 49.86,12.7 v51.82,10.74
N$16
  Bottom 0.406: K3.10 82.55,3.81 X10.2
N$17  (via drill 0.3)
  Top 0.406: v32.59,4.04 SJ2.1
  Bottom 0.406: v32.59,4.04 32.36,3.81 R6.2
N$18
  Bottom 0.406: R11.1 75.23,27.43 79.15,27.43 82.35,30.63 82.35,33.3 SELECT.4 SELECT.3
N$19
  Top 0.61: K3.5 80.01,20.32 | 80.01,20.32 K3.6 | 80.01,20.32 X10.3
N$20
  Top 0.406: K3.1 85.09,6.35 X10.1
N$21  (via drill 0.3)
  Top 0.406: LED3.C v91.44,6.55
  Bottom 0.406: v91.44,6.55 R1.1
N$22
  Bottom 0.406: U$1.P$5 R22.1
N$23
  Bottom 0.406: U$1.P$2 R25.1
N$24
  Bottom 0.406: U$1.P$3 R24.1
N$25
  Bottom 0.406: U$1.P$4 R23.1
N$26
  Bottom 0.457: T1.C 28.88,46.66 U$1.P$7
N$27
  Top 0.406: T2.B R19.1
N$28  (via drill 0.3)
  Top 0.406: v24.97,4.04 SJ3.1
  Bottom 0.406: v24.97,4.04 24.74,3.81 R18.2
N$29
  Top 0.406: SG1.- T2.C
N$30
  Top 0.406: DS1.2 6.1,19 5.87,19.23 5.87,20.9 X1.1
N$31  (via drill 0.3)
  Top 0.406: v41.48,5.08 SJ1.1
  Bottom 0.406: R5.2 v41.48,5.08
N$32  (via drill 0.3)
  Top 0.406: v15.42,34.16 13.99,34.16 U1.8
  Bottom 0.406: v15.42,34.16 15.77,34.52 18.54,34.52 X2.1 18.75,34.54 20.85,34.54 C9.2
N$33  (via drill 0.3)
  Top 0.406: v12.83,30.1 10.92,32 10.92,33.33 13.97,33.33 U1.7
  Bottom 0.406: v12.83,30.1 13.46,29.46 18.54,29.46 X2.2 18.75,29.34 20.52,29.34 20.9,28.96 C8.2
N$34  (via drill 0.3)
  Top 0.406: v40.82,33.4 40.82,33.12 IC2.27
  Bottom 0.406: v40.82,33.4 46.05,38.63 49.81,38.63 56.95,45.77 REA.1
N$35
  Top 0.406: U1.20 1.93,31.75 1.93,32 C2.1
N$36  (via drill 0.3)
  Top 0.406: v5.36,17.45 5.36,18.47 DS1.3
  Bottom 0.406: v5.36,17.45 6.45,16.36 11.79,16.36 BAT1.1
N$37  (via drill 0.3)
  Top 0.406: v43.61,46.1 43.61,38.53 42.42,37.34 42.42,32.49 39.6,32.49 IC2.26
  Bottom 0.406: v43.61,46.1 43.61,47.35 44.07,47.35 REB.1
N$39  (via drill 0.3)
  Top 0.406: v30.43,33.78 32.26,33.78 IC2.1
  Bottom 0.406: v30.43,33.78 29.72,34.49 29.18,34.49 CAP.1
N$40  (via drill 0.3)
  Top 0.406: U$2.8 44.45,17.14 X12.1 44.55,16.33 44.55,13.16 v45.72,11.99
  Bottom 0.406: v45.72,11.99 C15.2
N$41
  Top 0.406: IC2.24 43.48,31.17 X3.2
  Bottom 0.406: C6.1 45.87,34.09 45.34,33.55 43.51,33.55 X3.2
N$42
  Top 0.406: IC2.23 39.6,30.5 43.48,30.5 43.48,28.47 X3.1
  Bottom 0.406: C7.1 45.85,28.25 45.64,28.45 43.51,28.45 X3.1
N$43
  Top 0.406: U$2.14 32.77,10.79 32.77,8.89 C17.1
N$44
  Bottom 0.406: T1.B 29.21,44.15 27.94,42.88 R21.1
N$46  (via drill 0.3)
  Top 0.406: RESET.3 88.85,41.94 95.33,41.94 RESET.4 | v11.3,25.12 10.19,26.24 10.19,26.92 10.08,27.03 U1.29
  Bottom 0.406: v11.3,25.12 36.65,25.12 38.38,23.39 60.98,23.39 67.51,29.92 67.51,34.65 84.07,34.65 88.65,30.07 89.64,30.07 | 89.64,30.07 90.17,29.54 R17.1 | RESET.3 89.97,40.79 89.97,30.25 89.74,30.25 89.64,30.07
N$54
  Bottom 0.406: C5.2 54.05,30.07 54.13,30 R16.2 54.33,30 57.4,30 R15.1
N$59  (via drill 0.3)
  Top 0.406: v45.8,21.69 39.22,21.69 36.42,24.49 36.42,24.51 33.07,24.51 32.28,25.3 IC2.14
  Bottom 0.406: v45.8,21.69 45.31,22.17 44.55,22.17 RBS.2
RD+
  Top 0.406: IC2.13 32.28,25.96 36.98,25.96 36.98,24.79 39.37,22.4 49.1,22.4 49.1,21.61 49.81,20.9 54.63,20.9 54.63,31.39 57.12,33.88 57.12,36.83 RJ1.RD+
  Bottom 0.406: R15.2 57.4,31.9 56.19,33.12 55.4,33.12 54.69,33.83 54.69,35.66 55.96,35.66 57.12,36.83 RJ1.RD+
RD-  (via drill 0.3)
  Top 0.406: v37.47,29.03 37.47,26.62 32.28,26.62 IC2.12
  Bottom 0.406: v37.47,29.03 43.92,35.48 52.15,35.48 53.31,34.31 RJ1.RD- 53.39,34.11 53.39,32.64 54.13,31.9 R16.1
RESET  (via drill 0.3)
  Top 0.406: 30.4,18.39 30.4,9.22 30.73,8.89 C17.2 | 30.4,18.39 30.4,27.91 32.26,27.91 IC2.10 | v30.45,18.39 30.4,18.39
  Bottom 0.406: v30.45,18.39 49.12,18.39 50.27,19.53 ISP.5
SCL  (via drill 0.3)
  Top 0.406: 9.47,19.1 9.47,18.14 6.82,15.48 | 9.47,19.1 9.47,21.39 9.37,21.49 9.37,26.95 9.3,27.03 U1.28 | 6.82,15.48 4.85,13.51 4.85,12.85 DS1.6 | v9.65,19.1 9.47,19.1 | X4.1 15.14,5.82 15.14,7.16 6.82,15.48
  Bottom 0.406: v9.65,19.1 38.68,19.1 39.78,20.19 R7.1
SDA  (via drill 0.3)
  Top 0.406: U1.27 8.59,27.15 8.59,27.86 8.91,28.19 v9.22,28.19 | v3.61,28.02 2.82,27.23 2.82,13.59 3.56,12.85 DS1.5 3.66,12.65 4.01,12.29 4.01,0.58 15.19,0.58 X4.2
  Bottom 0.406: 9.04,28.02 v9.22,28.19 | v3.61,28.02 9.04,28.02 | R8.1 37.03,20.45 35.79,20.45 33.76,22.48 33.76,24.51 11.71,24.51 11.61,24.41 11,24.41 9.14,26.26 9.14,27.84 9.04,28.02
TCT
  Bottom 0.406: L1.1 62.53,27.91 62.53,30.1 C4.2 62.64,30.28 63.02,30.28 63.02,33.05 R14.2 62.87,33.2 62.28,33.2 R20.1 62.1,35.48 57.05,35.48 RJ1.P4
TD+
  Top 0.406: IC2.17 52.15,26.62 52.15,35.26 53.42,36.52 53.42,37.34 54.71,38.63 59.66,38.63 59.66,36.85 RJ1.TD+
  Bottom 0.406: R20.2 62.26,37.9 61.44,37.08 59.92,37.08 RJ1.TD+
TD-
  Top 0.406: IC2.16 39.6,25.98 54.03,25.98 54.03,33.33 54.69,33.98 54.69,35.26 55.96,36.52 55.96,37.34 56.64,38.02 58.4,38.02 58.4,34.31 RJ1.TD-
  Bottom 0.406: R14.1 61.14,33.07 59.92,34.29 58.42,34.29 RJ1.TD-
TXD  (via drill 0.3)
  Top 0.406: v37.64,10.79 U$2.3 | v26.87,14.15 12.93,28.09 11.68,28.09 U1.31
  Bottom 0.406: v37.64,10.79 34.29,14.15 v26.87,14.15
V$
  Bottom 0.406: U$1.P$1 R26.1

## Text on the board
tNames: Saules kolektoriaus valdiklis v2.0 | www.SauleVire.lt | 2014.02
bNames: Saules kolektoriaus / valdiklis v2.0 | www.SauleVire.lt | 2014.02
BoxDim: Serpac WM-032C Enclosure | All units are in inch | Left | Right | Front | Bottom